# Altium PCB pcb.PcbDoc (part 1 of 2)
Units mil, origin at the board's own origin, x right, y up, seen from the top; angles counter-clockwise.
Board outline 3184 x 2328 mil, 2 copper layers (Top Layer, Bottom Layer); 79 components, 127 nets, 411 pads, 380 vias.
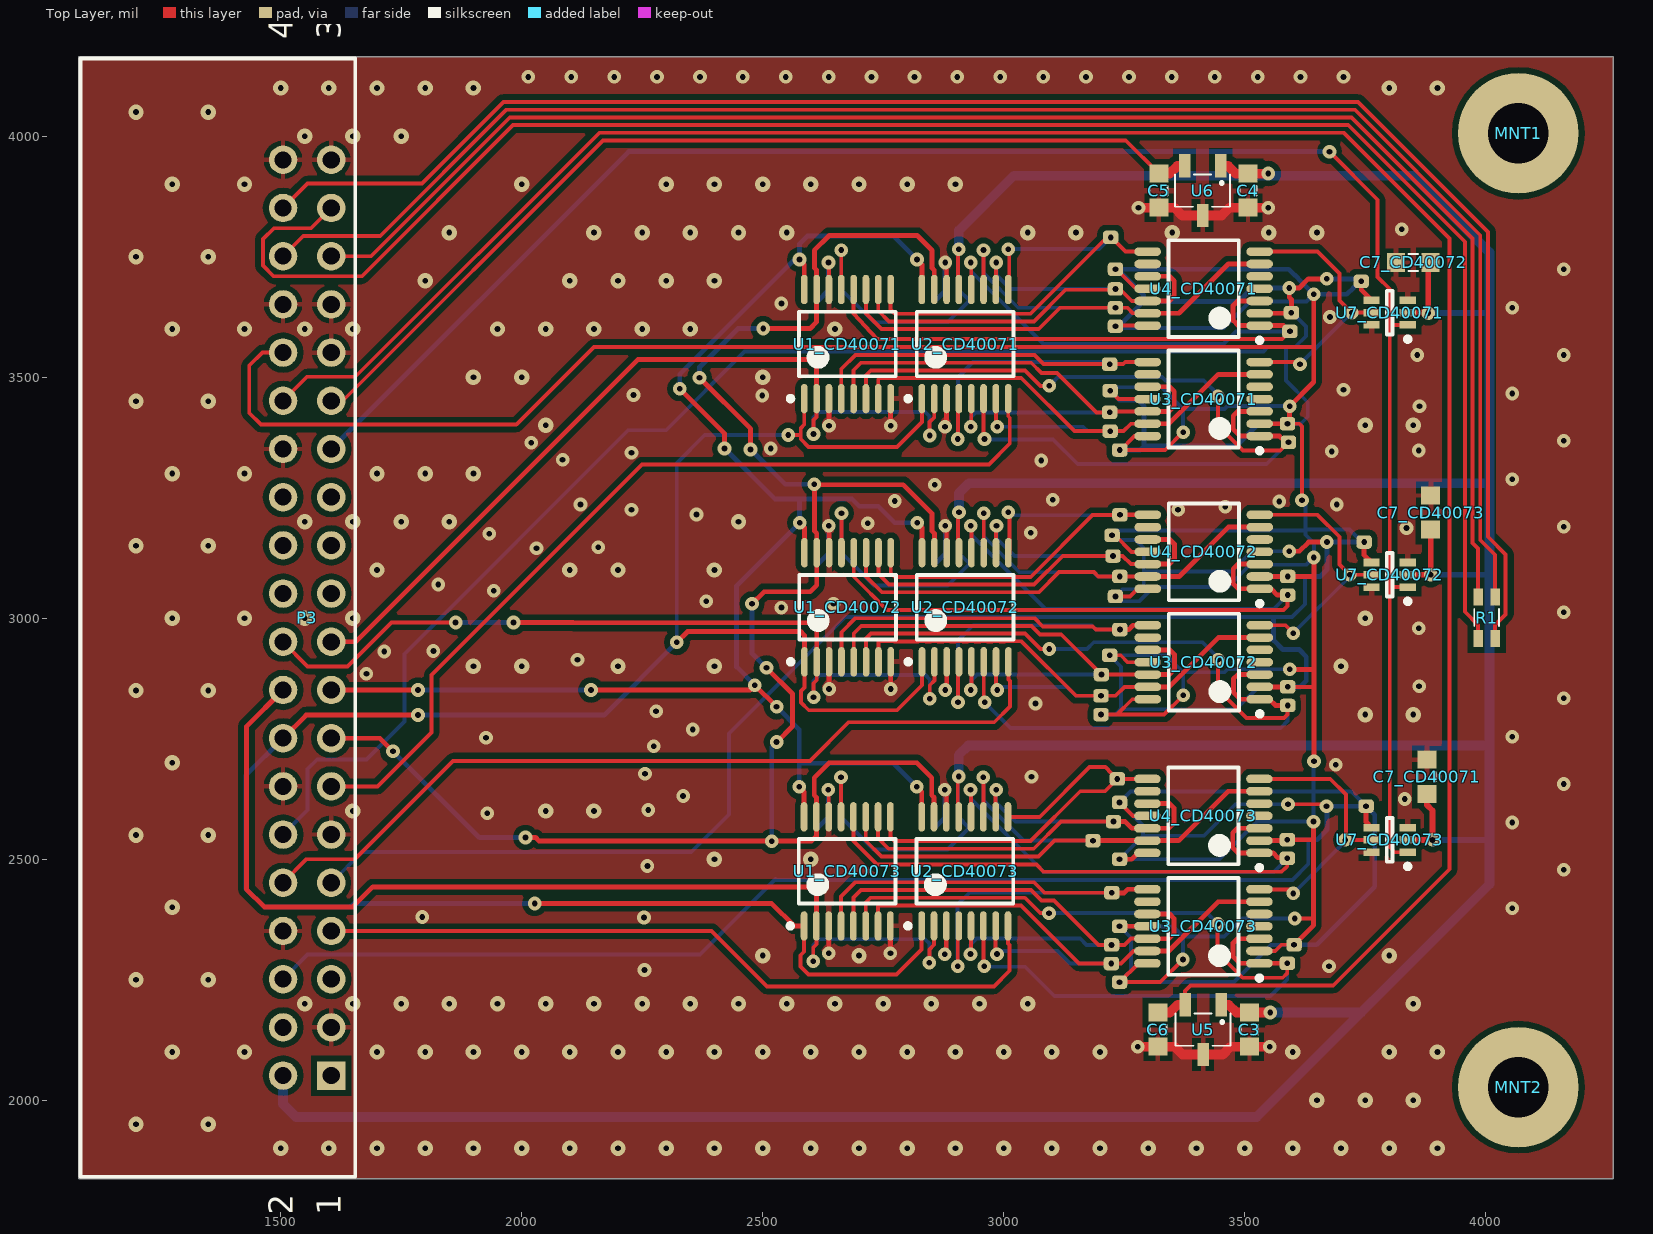
[diagram p0: Top Layer view]
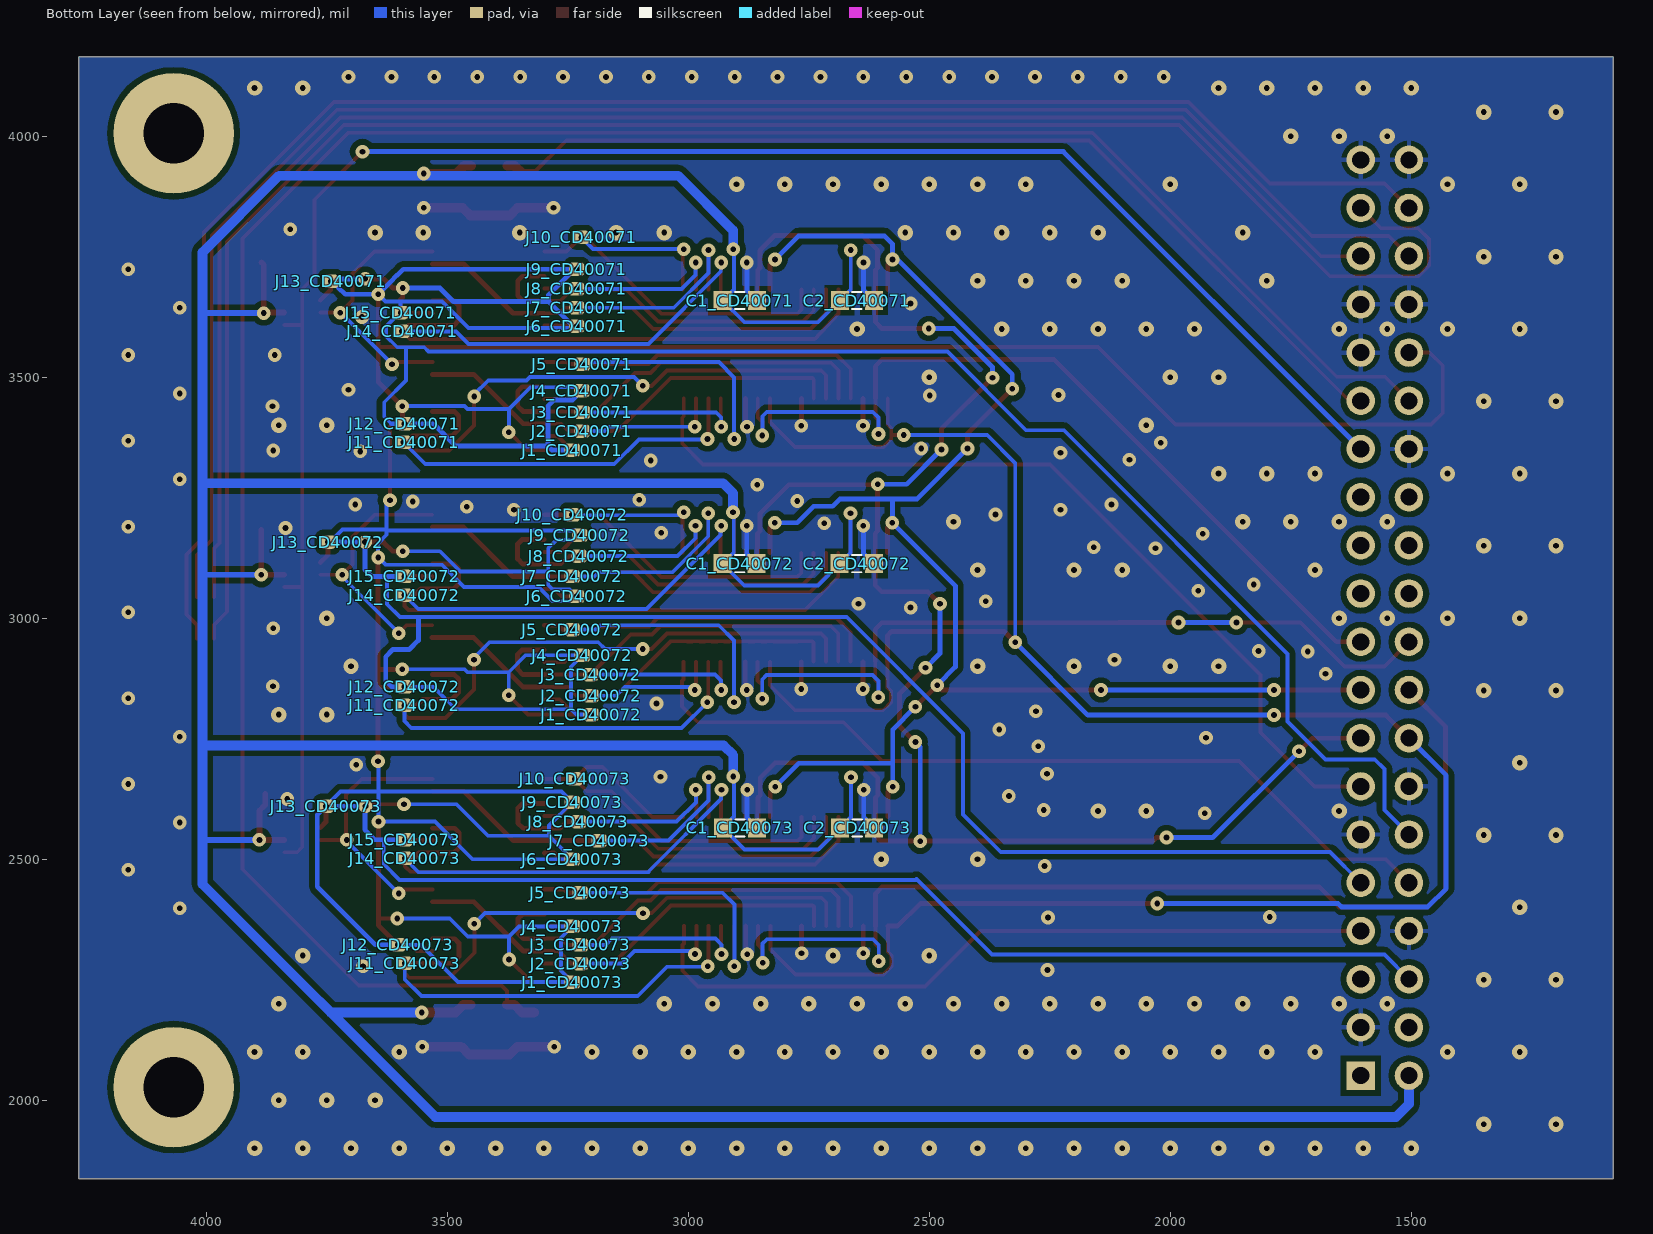
[diagram p1: Bottom Layer view, seen from below]
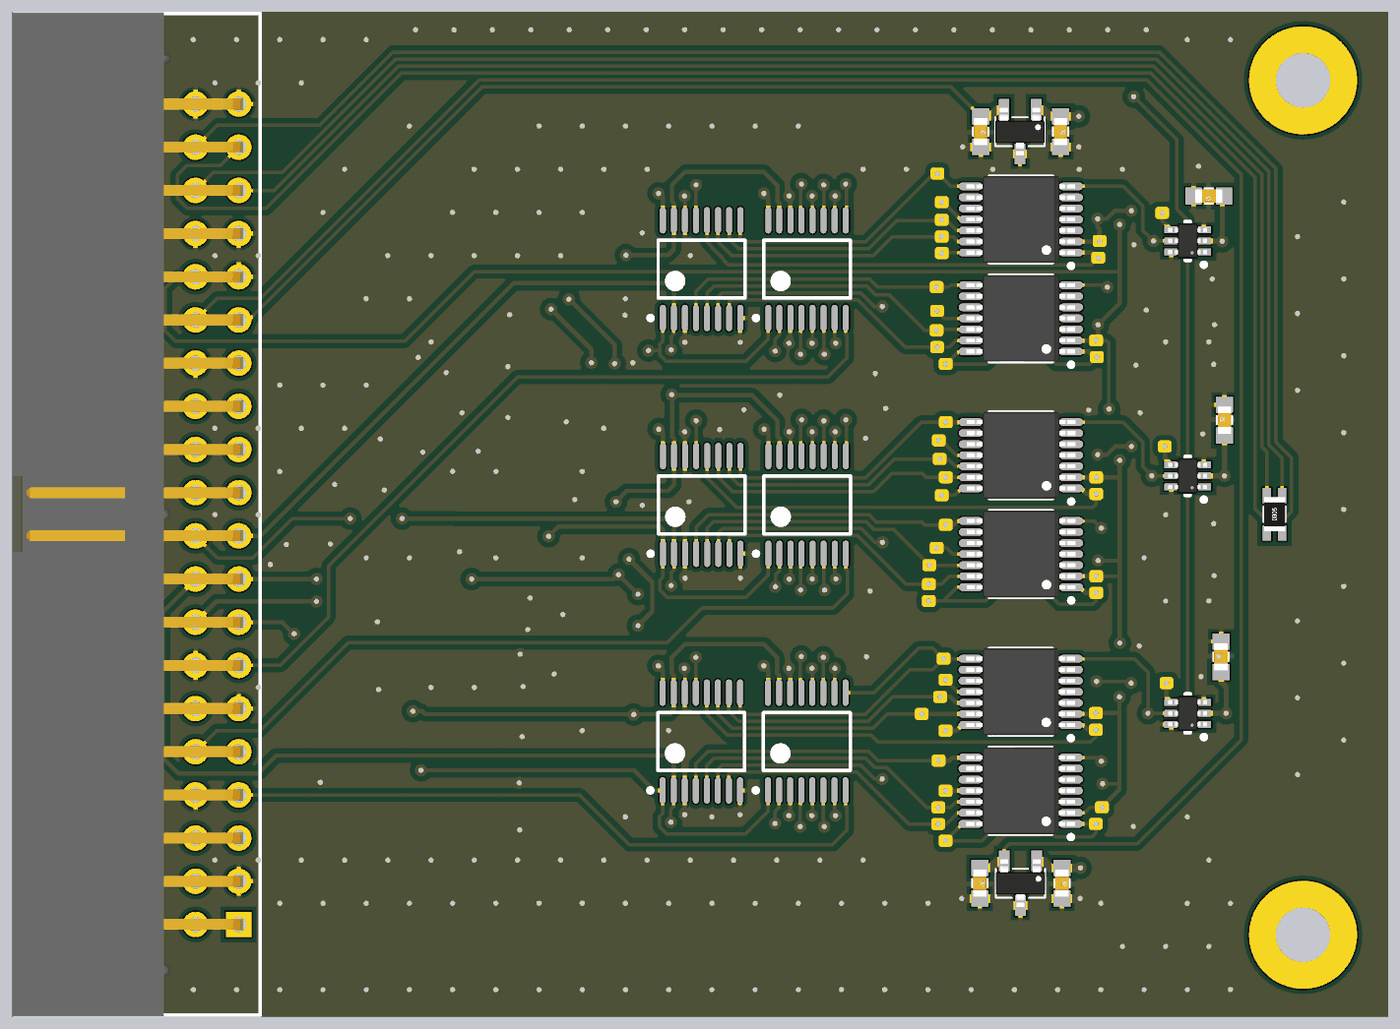
[diagram p3: 3D render of the assembled board from above, using the file's embedded part models]

## Layer stack, top to bottom
Top Solder: solder mask 0.4, Solder Resist, Dk 3.5
Top Layer: signal copper 1.4
Dielectric 1: dielectric 12.6, FR-4, Dk 4.8
Bottom Layer: signal copper 1.4
Bottom Solder: solder mask 0.4, Solder Resist, Dk 3.5

## Board outline
1081,1837 4265,1837 4265,4165 1081,4165

## Design rules (kind name [scope] priority, off if disabled: settings)
Clearance Clearance_Nets [InNet('NetJ1_CD40072_3') vs InNet('CURRENT RTN')] p1: gap=0
Clearance Clearance_Polygon [InPolygon] p2: gap=12
Clearance Clearance_TSSOP [HasFootprint('TSSOP14') vs HasFootprint('TSSOP14')] p3: gap=6
Clearance Clearance_3WaySplitter-RadFET [HasFootprint('3WaySplitter-RadFET') vs HasFootprint('3WaySplitter-RadFET')] p4: gap=0
Clearance [All] p5: gap=8
PolygonConnect PolygonConnect_Vias [IsVia] p1: connectstyle=Direct reliefconductorwidth=10 reliefentries=4 polygonreliefangle="90 Angle" airgapwidth=10
PolygonConnect [All] p2: connectstyle=Relief reliefconductorwidth=10 reliefentries=4 polygonreliefangle="90 Angle" airgapwidth=10
RoomDefinition top [InComponentClass('top')] p1: confinementstyle=ConfineIn formatcopy=TRUE lockcomponents=FALSE outline 0,0 2000,0 2000,1000 0,1000
RoomDefinition CD40073 [InComponentClass('CD40073')] p2: confinementstyle=ConfineIn formatcopy=TRUE lockcomponents=FALSE outline 2372.32,2214 3721.76,2214 3721.76,2760 2372.32,2760
RoomDefinition CD40072 [InComponentClass('CD40072')] p3: confinementstyle=ConfineIn formatcopy=TRUE lockcomponents=FALSE outline 2372.32,2760 3721.76,2760 3721.76,3306 2372.32,3306
RoomDefinition CD40071 [InComponentClass('CD40071')] p4: confinementstyle=ConfineIn formatcopy=TRUE lockcomponents=FALSE outline 2372,3306 3721.44,3306 3721.44,3852 2372,3852
RoutingVias [All] p1: holewidth=28 width=50 viastyle="Through Hole" minholewidth=28 minwidth=50 maxholewidth=28 maxwidth=50
ShortCircuit ShortCircuit_1 [InNet('NetJ1_CD40072_3') vs InNet('CURRENT_IN_CD40071')] p1: allowed=TRUE
ShortCircuit ShortCircuit_general [All] p2: allowed=TRUE
SolderMaskExpansion [All] p1: expansion=4
Width [All] p1: maxlimit=100 minlimit=8 preferedwidth=10
29 further rules are at their usual default settings.

## Classes and differential pairs
channel class CD4007_with_mux: CD40071 CD40072 CD40073
component class top: C3 C4 C5 C6 MNT1 MNT2 P3 R1 U5 U6
component class CD40073: C1_CD40073 C2_CD40073 C7_CD40073 J1_CD40073 J2_CD40073 J3_CD40073 J4_CD40073 J5_CD40073 J6_CD40073 J7_CD40073 J8_CD40073 J9_CD40073 J10_CD40073 J11_CD40073 J12_CD40073 J13_CD40073 J14_CD40073 J15_CD40073 U1_CD40073 U2_CD40073 U3_CD40073 U4_CD40073 U7_CD40073
component class CD40072: C1_CD40072 C2_CD40072 C7_CD40072 J1_CD40072 J2_CD40072 J3_CD40072 J4_CD40072 J5_CD40072 J6_CD40072 J7_CD40072 J8_CD40072 J9_CD40072 J10_CD40072 J11_CD40072 J12_CD40072 J13_CD40072 J14_CD40072 J15_CD40072 U1_CD40072 U2_CD40072 U3_CD40072 U4_CD40072 U7_CD40072
component class CD40071: C1_CD40071 C2_CD40071 C7_CD40071 J1_CD40071 J2_CD40071 J3_CD40071 J4_CD40071 J5_CD40071 J6_CD40071 J7_CD40071 J8_CD40071 J9_CD40071 J10_CD40071 J11_CD40071 J12_CD40071 J13_CD40071 J14_CD40071 J15_CD40071 U1_CD40071 U2_CD40071 U3_CD40071 U4_CD40071 U7_CD40071

## Components (designator, comment, footprint, x,y, rotation, side; value= is the part's Value field where it differs from the comment)
C1_CD40071 "100n/50V" SMD_Capacitor_0603 2893.44,3659 r180 bottom (schematic designator C1)
C1_CD40072 "100n/50V" SMD_Capacitor_0603 2893.76,3113 r180 bottom (schematic designator C1)
C1_CD40073 "100n/50V" SMD_Capacitor_0603 2893,2565 r180 bottom (schematic designator C1)
C2_CD40071 "100n/50V" SMD_Capacitor_0603 2650.44,3659 r180 bottom (schematic designator C2)
C2_CD40072 "100n/50V" SMD_Capacitor_0603 2650.76,3113 r180 bottom (schematic designator C2)
C2_CD40073 "100n/50V" SMD_Capacitor_0603 2650,2565 r180 bottom (schematic designator C2)
C3 "100n/50V" SMD_Capacitor_0603 3510,2146.44 r270 top
C4 "100n/50V" SMD_Capacitor_0603 3507,3887 r270 top
C5 "100n/50V" SMD_Capacitor_0603 3322,3887 r270 top
C6 "100n/50V" SMD_Capacitor_0603 3320,2146.44 r270 top
C7_CD40071 "100n/50V" SMD_Capacitor_0603 3878,2671 r90 top (schematic designator C7)
C7_CD40072 "100n/50V" SMD_Capacitor_0603 3850,3738 r180 top (schematic designator C7)
C7_CD40073 "100n/50V" SMD_Capacitor_0603 3886,3219 r90 top (schematic designator C7)
J1_CD40071 "3 way net tie junction T shape" "3WaySplitter-RadFET - Test" 3241,3348.91 r0 bottom net-tie (schematic designator J1)
J1_CD40072 "3 way net tie junction T shape" "3WaySplitter-RadFET - Test" 3202,2800 r0 bottom net-tie (schematic designator J1)
J1_CD40073 "3 way net tie junction T shape" "3WaySplitter-RadFET - Test" 3240.56,2244.91 r0 bottom net-tie (schematic designator J1)
J2_CD40071 "3 way net tie junction T shape" "3WaySplitter-RadFET - Test" 3221,3388 r0 bottom net-tie (schematic designator J2)
J2_CD40072 "3 way net tie junction T shape" "3WaySplitter-RadFET - Test" 3202,2839 r0 bottom net-tie (schematic designator J2)
J2_CD40073 "3 way net tie junction T shape" "3WaySplitter-RadFET - Test" 3223.56,2283.5 r0 bottom net-tie (schematic designator J2)
J3_CD40071 "3 way net tie junction T shape" "3WaySplitter-RadFET - Test" 3220,3427 r0 bottom net-tie (schematic designator J3)
J3_CD40072 "3 way net tie junction T shape" "3WaySplitter-RadFET - Test" 3203,2883 r0 bottom net-tie (schematic designator J3)
J3_CD40073 "3 way net tie junction T shape" "3WaySplitter-RadFET - Test" 3224,2322 r0 bottom net-tie (schematic designator J3)
J4_CD40071 "3 way net tie junction T shape" "3WaySplitter-RadFET - Test" 3221,3472 r0 bottom net-tie (schematic designator J4)
J4_CD40072 "3 way net tie junction T shape" "3WaySplitter-RadFET - Test" 3220,2923 r0 bottom net-tie (schematic designator J4)
J4_CD40073 "3 way net tie junction T shape" "3WaySplitter-RadFET - Test" 3240.56,2360.68 r0 bottom net-tie (schematic designator J4)
J5_CD40071 "3 way net tie junction T shape" "3WaySplitter-RadFET - Test" 3220,3527 r0 bottom net-tie (schematic designator J5)
J5_CD40072 "3 way net tie junction T shape" "3WaySplitter-RadFET - Test" 3241.32,2976.46 r0 bottom net-tie (schematic designator J5)
J5_CD40073 "3 way net tie junction T shape" "3WaySplitter-RadFET - Test" 3224.56,2430.46 r0 bottom net-tie (schematic designator J5)
J6_CD40071 "3 way net tie junction T shape" "3WaySplitter-RadFET - Test" 3232,3605.91 r0 bottom net-tie (schematic designator J6)
J6_CD40072 "3 way net tie junction T shape" "3WaySplitter-RadFET - Test" 3232,3045 r0 bottom net-tie (schematic designator J6)
J6_CD40073 "3 way net tie junction T shape" "3WaySplitter-RadFET - Test" 3240.56,2499.91 r0 bottom net-tie (schematic designator J6)
J7_CD40071 "3 way net tie junction T shape" "3WaySplitter-RadFET - Test" 3232,3644 r0 bottom net-tie (schematic designator J7)
J7_CD40072 "3 way net tie junction T shape" "3WaySplitter-RadFET - Test" 3241.13,3086.5 r0 bottom net-tie (schematic designator J7)
J7_CD40073 "3 way net tie junction T shape" "3WaySplitter-RadFET - Test" 3185.38,2538.5 r0 bottom net-tie (schematic designator J7)
J8_CD40071 "3 way net tie junction T shape" "3WaySplitter-RadFET - Test" 3232,3683 r0 bottom net-tie (schematic designator J8)
J8_CD40072 "3 way net tie junction T shape" "3WaySplitter-RadFET - Test" 3227,3129 r0 bottom net-tie (schematic designator J8)
J8_CD40073 "3 way net tie junction T shape" "3WaySplitter-RadFET - Test" 3228,2578 r0 bottom net-tie (schematic designator J8)
J9_CD40071 "3 way net tie junction T shape" "3WaySplitter-RadFET - Test" 3232,3724 r0 bottom net-tie (schematic designator J9)
J9_CD40072 "3 way net tie junction T shape" "3WaySplitter-RadFET - Test" 3225,3172 r0 bottom net-tie (schematic designator J9)
J9_CD40073 "3 way net tie junction T shape" "3WaySplitter-RadFET - Test" 3240.56,2617.68 r0 bottom net-tie (schematic designator J9)
J10_CD40071 "3 way net tie junction T shape" "3WaySplitter-RadFET - Test" 3222,3790 r0 bottom net-tie (schematic designator J10)
J10_CD40072 "3 way net tie junction T shape" "3WaySplitter-RadFET - Test" 3241.32,3214.46 r0 bottom net-tie (schematic designator J10)
J10_CD40073 "3 way net tie junction T shape" "3WaySplitter-RadFET - Test" 3236,2666.46 r0 bottom net-tie (schematic designator J10)
J11_CD40071 "3 way net tie junction T shape" "3WaySplitter-RadFET - Test" 3591,3365 r180 bottom net-tie (schematic designator J11)
J11_CD40072 "3 way net tie junction T shape" "3WaySplitter-RadFET - Test" 3589.31,2818.91 r180 bottom net-tie (schematic designator J11)
J11_CD40073 "3 way net tie junction T shape" "3WaySplitter-RadFET - Test" 3588.56,2283.91 r180 bottom net-tie (schematic designator J11)
J12_CD40071 "3 way net tie junction T shape" "3WaySplitter-RadFET - Test" 3589,3403.5 r180 bottom net-tie (schematic designator J12)
J12_CD40072 "3 way net tie junction T shape" "3WaySplitter-RadFET - Test" 3589.31,2857.5 r180 bottom net-tie (schematic designator J12)
J12_CD40073 "3 way net tie junction T shape" "3WaySplitter-RadFET - Test" 3602.56,2322.5 r180 bottom net-tie (schematic designator J12)
J13_CD40071 "3 way net tie junction T shape" "3WaySplitter-RadFET - Test" 3742,3699 r180 bottom net-tie (schematic designator J13)
J13_CD40072 "3 way net tie junction T shape" "3WaySplitter-RadFET - Test" 3748,3158 r180 bottom net-tie (schematic designator J13)
J13_CD40073 "3 way net tie junction T shape" "3WaySplitter-RadFET - Test" 3752,2610 r180 bottom net-tie (schematic designator J13)
J14_CD40071 "3 way net tie junction T shape" "3WaySplitter-RadFET - Test" 3594,3595 r180 bottom net-tie (schematic designator J14)
J14_CD40072 "3 way net tie junction T shape" "3WaySplitter-RadFET - Test" 3589.31,3047.91 r180 bottom net-tie (schematic designator J14)
J14_CD40073 "3 way net tie junction T shape" "3WaySplitter-RadFET - Test" 3588.56,2501.91 r180 bottom net-tie (schematic designator J14)
J15_CD40071 "3 way net tie junction T shape" "3WaySplitter-RadFET - Test" 3597,3634 r180 bottom net-tie (schematic designator J15)
J15_CD40072 "3 way net tie junction T shape" "3WaySplitter-RadFET - Test" 3589.31,3086.5 r180 bottom net-tie (schematic designator J15)
J15_CD40073 "3 way net tie junction T shape" "3WaySplitter-RadFET - Test" 3588.56,2540.5 r180 bottom net-tie (schematic designator J15)
MNT1 "Mounting Hole" PC-104_PcbMntHole_M3 4068,4006 r180 top
MNT2 "Mounting Hole" PC-104_PcbMntHole_M3 4068,2027 r0 top
P3 "IDC-40-RadFET" IDC-40-Male-Socket-Angle 1605,2051.03 r90 top
R1 "PT1000" SMD_Resistor-shunt_0805 4002,3001 r90 top
U1_CD40071 "ADG708BRU" ADI-RU-16_N 2676,3568.68 r90 top (schematic designator U1)
U1_CD40072 "ADG708BRU" ADI-RU-16_N 2676.32,3022.68 r90 top (schematic designator U1)
U1_CD40073 "ADG708BRU" ADI-RU-16_N 2675.56,2474.68 r90 top (schematic designator U1)
U2_CD40071 "ADG708BRU" ADI-RU-16_N 2920,3568.68 r90 top (schematic designator U2)
U2_CD40072 "ADG708BRU" ADI-RU-16_N 2920.32,3022.68 r90 top (schematic designator U2)
U2_CD40073 "ADG708BRU" ADI-RU-16_N 2919.56,2474.68 r90 top (schematic designator U2)
U3_CD40071 "CD4007" TSSOP14 3415,3454.68 r180 top (schematic designator U3)
U3_CD40072 "CD4007" TSSOP14 3415.32,2908.68 r180 top (schematic designator U3)
U3_CD40073 "CD4007" TSSOP14 3414.56,2360.68 r180 top (schematic designator U3)
U4_CD40071 "CD4007" TSSOP14 3415,3683.68 r180 top (schematic designator U4)
U4_CD40072 "CD4007" TSSOP14 3415.32,3137.68 r180 top (schematic designator U4)
U4_CD40073 "CD4007" TSSOP14 3414.56,2589.68 r180 top (schematic designator U4)
U5 "LM60" SOT23-3 3414,2146.44 r270 top
U6 "LM60" SOT23-3 3413,3887 r270 top
U7_CD40071 "ADG849YKSZ" SC70-LT6_N 3801,3634 r180 top (schematic designator U7)
U7_CD40072 "ADG849YKSZ" SC70-LT6_N 3801,3090 r180 top (schematic designator U7)
U7_CD40073 "ADG849YKSZ" SC70-LT6_N 3801,2540 r180 top (schematic designator U7)

## Footprints (in the part's own frame and the unit in brackets; to place one, negate y for a bottom-side part, rotate by r counter-clockwise, add the part's x,y. Pads: shape width x height; smd on the part's side, far side on the other; paste and mask are expansions set on the pad)
"3WaySplitter-RadFET - Test" [mil] "3WaySplitter"
  rrect50% 32x28 all layers, no hole paste+0 mask+0: 1(0,0) 3(0,0)
  rrect50% 32x28 hole 11.81 paste+0 mask+0: 2(0,0)
ADI-RU-16_N [mm] "SOP, 16-Leads, Body 5x4.4mm, Pitch 0.65mm, IPC Medium Density"
  oval 1.55x0.35 smd: 1(-2.875,2.275) 2(-2.875,1.625) 3(-2.875,0.975) 4(-2.875,0.325) 5(-2.875,-0.325) 6(-2.875,-0.975) 7(-2.875,-1.625) 8(-2.875,-2.275) 9(2.875,-2.275) 10(2.875,-1.625) 11(2.875,-0.975) 12(2.875,-0.325) 13(2.875,0.325) 14(2.875,0.975) 15(2.875,1.625) 16(2.875,2.275)
  silkscreen extent -3,-2.55 1.7,3.12, body extent -2.25,-2.55 2.25,2.55, height 1.2
IDC-40-Male-Socket-Angle [mm] "Connector; IDC 40, Male Socket Angle"
  rect 1.5x1.5 hole 0.9: 1(0,0)
  round 1.5 hole 0.9: 2(0,2.54) 3(2.54,0) 4(2.54,2.54) 5(5.08,0) 6(5.08,2.54) 7(7.62,0) 8(7.62,2.54) 9(10.16,0) 10(10.16,2.54) 11(12.7,0) 12(12.7,2.54) 13(15.24,0) 14(15.24,2.54) 15(17.78,0) 16(17.78,2.54) 17(20.32,0) 18(20.32,2.54) 19(22.86,0) 20(22.86,2.54) 21(25.4,0) 22(25.4,2.54) 23(27.94,0) 24(27.94,2.54) 25(30.48,0) 26(30.48,2.54) 27(33.02,0) 28(33.02,2.54) 29(35.56,0) 30(35.56,2.54) 31(38.1,0) 32(38.1,2.54) 33(40.64,0) 34(40.64,2.54) 35(43.18,0) 36(43.18,2.54) 37(45.72,0) 38(45.72,2.54) 39(48.26,0) 40(48.26,2.54)
  silkscreen extent -5.33,-1.27 53.59,13.21, body extent -5.39,-0.25 53.65,13.31, height 9.08
PC-104_PcbMntHole_M3 [mm] "PCB Mounting Hole for PC-104 standard. Based on Pumpkin's Kit."
  round 6.35 hole 3.2: 1(0,0)
SC70-LT6_N [mm] "SOT353, 6-Leads, Body 2x1.3mm, Pitch 0.65mm, Lead Span 2.1mm, IPC Medium Density"
  rect 0.85x0.4 smd: 1(-0.95,0.65) 2(-0.95,0) 3(-0.95,-0.65) 4(0.95,-0.65) 5(0.95,0) 6(0.95,0.65)
  silkscreen extent -1.07,-1.15 0.15,1.52, body extent -1.15,-1.05 1.15,1.05, height 1
SMD_Capacitor_0603 [mm] "SMD Capacitor, Inch 0603, Metric 1608."
  rect 0.95x1 smd: 1(-0.9,0) 2(0.9,0)
  silkscreen extent -0.25,-0.45 0.25,0.45, body extent -0.8,-0.4 0.8,0.4, height 0.3
SMD_Resistor-shunt_0805 [mm] "SMD Shunt Resistor, Inch 0805, Metric 2012."
  rect 0.9x0.5 smd: 1(-1.1,0.45) 2(-1.1,-0.45) 3(1.1,-0.45) 4(1.1,0.45)
  silkscreen extent -0.45,-0.65 0.45,0.65, body extent -1,-0.62 1,0.63, height 0.5
SOT23-3 [mm] "JEDEC TO-236AB package."
  rect 1.22x0.62 smd: 1(-1.31,0.95) 2(-1.31,-0.95) 3(1.31,0)
  silkscreen extent -0.85,-1.45 0.85,1.45, body extent -1.4,-1.45 1.4,1.45, height 1.3
TSSOP14 [mm] "TSSOP, 14-Leads, Body 5.00x4.40mm, Pitch 0.65mm, IPC Medium Density"
  oval 1.4x0.45 smd: 1(-2.95,1.95) 2(-2.95,1.3) 3(-2.95,0.65) 4(-2.95,0) 5(-2.95,-0.65) 6(-2.95,-1.3) 7(-2.95,-1.95) 8(2.95,-1.95) 9(2.95,-1.3) 10(2.95,-0.65) 11(2.95,0) 12(2.95,0.65) 13(2.95,1.3) 14(2.95,1.95)
  silkscreen extent -3.08,-2.55 1.85,2.85, body extent -3.2,-2.55 3.2,2.55, height 1.2

## Part data
C1_CD40071 C1_CD40072 C1_CD40073 C2_CD40071 C2_CD40072 C2_CD40073 C3 C4 C5 C6 C7_CD40071 C7_CD40072 C7_CD40073: library part Cer_C0603T104K5RALTU, "Ceramic Cap Kemet COTS 100n/50V X7R 0603"
J1_CD40071 J1_CD40072 J1_CD40073 J2_CD40071 J2_CD40072 J2_CD40073 J3_CD40071 J3_CD40072 J3_CD40073 J4_CD40071 J4_CD40072 J4_CD40073 J5_CD40071 J5_CD40072 J5_CD40073 J6_CD40071 J6_CD40072 J6_CD40073 J7_CD40071 J7_CD40072 J7_CD40073 J8_CD40071 J8_CD40072 J8_CD40073 J9_CD40071 J9_CD40072 J9_CD40073 J10_CD40071 J10_CD40072 J10_CD40073 J11_CD40071 J11_CD40072 J11_CD40073 J12_CD40071 J12_CD40072 J12_CD40073 J13_CD40071 J13_CD40072 J13_CD40073 J14_CD40071 J14_CD40072 J14_CD40073 J15_CD40071 J15_CD40072 J15_CD40073: library part 3wayT-RadFET
MNT1 MNT2: library part MntHole, "PCB Mounting Hole"
R1: "Platinum Thin-Film Chip Sensor"
U1_CD40071 U1_CD40072 U1_CD40073 U2_CD40071 U2_CD40072 U2_CD40073: "1.8 to 5.5 V / +/-2.5 V, CMOS Low Voltage 3 Ohm, 8-Channel Multiplexer, -40 to 125 degC, 16-pin SOP (RU-16), Tube"
U3_CD40071 U3_CD40072 U3_CD40073 U4_CD40071 U4_CD40072 U4_CD40073: "CMOS Dual Complementary Pair Plus Inverter"
U5 U6: "Analog temperature sensor"
U7_CD40071 U7_CD40072 U7_CD40073: "CMOS Analog switch"

## Via types
v1: diameter 28.35, hole 11.81, Top Layer to Bottom Layer, tented both sides, 210 vias
v2: diameter 32, hole 11.81, Top Layer to Bottom Layer, tented both sides, 170 vias

## Nets (pads, with @x,y where several pads share a name; then routed paths per layer and width w, separated by ;. In a path a pad name is that pad's centre, name@x,y a point inside that pad or via, vN(x,y) a via of type N, cw(c..) or ccw(c..) an arc to the next point about the centre after c; other vN are vias at no path point)
3.3V-DIGITAL: P3.4
4.5V-ANALOG: P3.1
5V-ANALOG: C1_CD40071.1 C1_CD40072.1 C1_CD40073.1 C2_CD40071.1 C2_CD40072.1 C2_CD40073.1 C3.1 C4.1 C7_CD40071.1 C7_CD40072.1 C7_CD40073.1 P3.2 U1_CD40071.13 U1_CD40072.13 U1_CD40073.13 U2_CD40071.13 U2_CD40072.13 U2_CD40073.13 U5.1 U6.1 U7_CD40071.2 U7_CD40072.2 U7_CD40073.2 | length 10873.1
  Top Layer w8: U1_CD40073.13@2662.76,2587.87 v1(2662.76,2669.68) ; U1_CD40071.13@2663.2,3681.87 v1(2663.2,3763.68) ; U1_CD40072.13@2663.52,3135.87 v1(2663.52,3217.68) ; U2_CD40073.13@2904.76,2587.87 v1@2904.76,2669.68 ; U2_CD40071.13@2905.2,3681.87 v1@2905.2,3763.68 ; U2_CD40072.13@2905.52,3135.87 v1@2905.52,3217.68
  Top Layer w12: U7_CD40073.2@3838.4,2540 v1(3890,2540) 3890,2601 3878,2613 C7_CD40071.1@3878,2635.57 ; U7_CD40072.2@3838.4,3090 v1(3886,3090) C7_CD40073.1@3886,3183.57 ; U7_CD40071.2@3838.4,3634 v1@3880,3634 ; v1(3881,3633) 3881,3733.57 C7_CD40072.1@3885.43,3738
  Top Layer w20: U6.1@3450.4,3938.57 3465.43,3938.57 3481.57,3922.43 C4.1@3507,3922.43 v1(3549,3922.43) ; U5.1@3451.4,2198.02 3466.98,2198.02 3483.13,2181.87 C3.1@3510,2181.87 v1(3553,2181.87)
  Bottom Layer w8: v1(2662.76,2669.68) 2662.76,2587.67 C2_CD40073.1@2685.43,2565 2730.43,2520 2883.43,2520 C1_CD40073.1@2928.43,2565 2905.18,2588.25 2905.18,2670.1 v1(2906.76,2671.68) ; v1(2663.2,3763.68) 2663.2,3681.67 C2_CD40071.1@2685.87,3659 2730.87,3614 2883.87,3614 C1_CD40071.1@2928.87,3659 2905.62,3682.25 2905.62,3764.1 v1(2907.2,3765.68) ; v1(2663.52,3217.68) 2663.52,3135.67 C2_CD40072.1@2686.19,3113 2731.19,3068 2884.19,3068 C1_CD40072.1@2929.19,3113 2905.94,3136.25 2905.94,3218.1 v1(2907.52,3219.68)
  Bottom Layer w12: v1(3881,3633) 4008,3633 ; v1(3886,3090) 4008,3090 ; v1(3890,2540) 4008,2540
  Bottom Layer w20: P3.2@1505,2051.03 1505,1992 1532,1965 3525,1965 4008,2448 4008,2540 4008,3759 3849,3918 3021,3918 2907.2,3804.2 v1(2907.2,3765.68) ; v1(2906.76,2671.68) 2906.76,2715.76 2927,2736 4008,2736 ; v1(2907.52,3219.68) 2907.52,3259.52 2928,3280 4006,3280 ; v1(3553,2181.87) 3741.87,2181.87
ADC_CD40071_P: J1_CD40071.1 J4_CD40071.1 J6_CD40071.1 J9_CD40071.1 J12_CD40071.1 J13_CD40071.1 J15_CD40071.1 P3.12 | length 4163.6
  Top Layer w10: 3597,3649 3597,3661 3592.44,3665.56 v1(3592.44,3685) 3613.44,3685 3632.44,3704 v1(3670.44,3704)
  Bottom Layer w8: P3.12@1505,2551.03 1556,2602.03 1556,2687 1576,2707 1678,2707 1757,2786 1757,2926 2221,3390 2299.44,3390 2462.44,3553 3539,3553 3548,3562 3586,3562 ; J15_CD40071.1@3598,3634 3627,3605 3627,3585 3604,3562 3586,3562 ; 3616.5,3403.5 3631,3418 3631,3448 3586,3493 3586,3562
  Bottom Layer w10: J4_CD40071.1@3221,3472 3240,3453 3278,3453 3291.44,3439.56 3291.44,3357 ; J9_CD40071.1@3234.41,3726.41 3290.44,3670.37 3290.44,3657 3487.4,3657 3515.4,3685 v1(3592.44,3685) ; J6_CD40071.1@3240,3607 3290.44,3657.44 ; J1_CD40071.1@3241,3349 3283.44,3349 3291.44,3357 ; 3616.5,3403.5 J12_CD40071.1@3589,3403.5 3528.78,3403.5 3482.27,3357 3291.44,3357 ; v1(3670.44,3704) J13_CD40071.1@3742,3704
ADC_CD40072_P: J1_CD40072.1 J4_CD40072.1 J6_CD40072.1 J9_CD40072.1 J12_CD40072.1 J13_CD40072.1 J15_CD40072.1 P3.9 | length 4005
  Top Layer w10: v1(3592.76,3139) 3613.76,3139 3632.76,3158 v1(3670.76,3158)
  Bottom Layer w8: P3.9@1605,2451.03 1668.97,2515 2352,2515 2430,2593 2430,2761 2671.46,3002.46 3598.46,3002.46 3625,3029 3625,3085 ; J1_CD40072.1@3201,2800 J1_CD40072.1@3202,2800 3232.38,2800 3243.69,2811.31 3243.69,2899.31 J4_CD40072.1@3220,2923 ; J6_CD40072.1@3232,3045 3247,3060 3281.76,3060 3290.76,3069 3290.76,3096.68 ; J9_CD40072.1@3235,3162 3274,3162 3290.76,3145.24 3290.76,3096.68 ; 3244,2811 3482.59,2811 3529.09,2857.5 J12_CD40072.1@3589.31,2857.5 ; v1(3592.76,3139) 3515.71,3139 3473.4,3096.68 3290.76,3096.68
  Bottom Layer w10: 3243.69,2811.31 3244,2811 ; 3560,3000 3560,2954 3579,2935 3613,2935 3628,2920 3628,2870 3615.5,2857.5 J12_CD40072.1@3589.31,2857.5 ; J15_CD40072.1@3589.31,3086.5 3657,3086.5 3670.93,3100.43 3670.93,3157.83 v1(3670.76,3158) J13_CD40072.1@3748,3158
ADC_CD40073_P: J1_CD40073.1 J4_CD40073.1 J6_CD40073.1 J9_CD40073.1 J12_CD40073.1 J13_CD40073.1 J15_CD40073.1 P3.6 | length 3976.7
  Top Layer w8: v1(3590,2614) 3666,2614 v1(3670,2610)
  Bottom Layer w8: P3.6@1505,2251.03 1555.97,2302 2370,2302 2527,2459 ; 2527,2457 3599,2457 3632,2490 3632,2541 ; J4_CD40073.1@3240.56,2360.68 3264.24,2337 3264.24,2268.6 J1_CD40073.1@3240.56,2244.91 3477.91,2244.91 3555,2322 J12_CD40073.1@3602.56,2322 ; J6_CD40073.1@3240.56,2499.91 3289.33,2548.68 ; J9_CD40073.1@3240.94,2618.06 3289.33,2569.67 3289.33,2548.68 ; v1(3590,2614) 3481,2614 3415.68,2548.68 3289.33,2548.68
  Bottom Layer w10: J15_CD40073.1@3588.56,2540.5 3650.5,2540.5 3671,2561 v1@3671,2608 ; J12_CD40073.1@3612.56,2322.5 3649.5,2322.5 3770,2443 3770,2592 J13_CD40073.1@3752,2610 v1(3670,2610)
ADC_CH0_N: P3.7 U2_CD40073.8 | length 1562.8
  Top Layer w8: P3.7@1605,2351.03 2393.97,2351.03 2509,2236 2979.87,2236 3012.32,2268.44 3012.32,2321.93 3009.13,2325.12 U2_CD40073.8@3009.13,2361.5
ADC_CH1_N: P3.10 U2_CD40072.8 | length 1753.8
  Top Layer w8: P3.10@1505,2451.03 1553.97,2500 1654,2500 1858,2704 2598,2704 2678,2784 2980.63,2784 3013.07,2816.44 3013.07,2869.93 3009.88,2873.12 U2_CD40072.8@3009.88,2909.5
ADC_CH2_N: P3.13 U2_CD40071.8 | length 1866.5
  Top Layer w8: P3.13@1605,2651.03 1701.03,2651.03 1813,2763 1813,2882 2250,3319 2969.32,3319 3012.76,3362.44 3012.76,3415.93 3009.57,3419.12 U2_CD40071.8@3009.57,3455.5
AIN0: C5.1 P3.29 U6.2 | length 2029.3
  Top Layer w8: P3.29@1605,3451.03 1629.03,3451.03 2169,3991 3253.43,3991 C5.1@3322,3922.43
  Top Layer w20: C5.1@3322,3922.43 3344.43,3922.43 3360.57,3938.57 U6.2@3375.6,3938.57
AIN1: C6.1 P3.30 U5.2 | length 4794.8
  Top Layer w8: P3.30@1505,3451.03 1554.97,3501 1654.97,3501 2160.97,4007 3706,4007 3925,3788 3925,2479 3684,2238 3388,2238 3376.6,2226.6 U5.2@3376.6,2198.02
  Top Layer w20: C6.1@3320,2181.87 3344.87,2181.87 3361.02,2198.02 U5.2@3376.6,2198.02
C_DIODE_0-2_CD40071: J5_CD40071.2 U1_CD40071.4 | length 638.1
  Top Layer w8: U1_CD40071.4@2663.2,3455.5 2663.2,3516.89 2692.32,3546.01 2793.27,3546.01 ; 2793.28,3546 2802.72,3546 ; 2802.73,3546.01 3063.89,3546.01 3082.9,3527 J5_CD40071.2@3220,3527
C_DIODE_0-2_CD40072: J5_CD40072.2 U1_CD40072.4 | length 661
  Top Layer w8: U1_CD40072.4@2663.52,2909.5 2663.52,2970.89 2692.64,3000.01 2793.59,3000.01 2803.03,3000 3064.2,3000.01 3081.21,2983 3185,2983 3191.54,2976.46 J5_CD40072.2@3241.32,2976.46
C_DIODE_0-2_CD40073: J5_CD40073.2 U1_CD40073.4 | length 644.2
  Top Layer w8: U1_CD40073.4@2662.76,2361.5 2662.76,2422.89 2691.88,2452.01 2792.83,2452.01 2802.28,2452 3063.45,2452.01 3085,2430.46 J5_CD40073.2@3224.56,2430.46
C_DIODE_3-5_CD40071: J10_CD40071.2 U1_CD40071.9 | length 565
  Top Layer w8: U1_CD40071.9@2765.57,3681.87 2765.57,3640.12 2774,3631.68 3056,3631.68 J10_CD40071.2@3218.16,3793.84
C_DIODE_3-5_CD40072: J10_CD40072.2 U1_CD40072.9 | length 556.5
  Top Layer w8: U1_CD40072.9@2765.88,3135.87 2765.88,3094.12 2774.32,3085.68 3056.32,3085.68 3184.63,3214 3224,3214
C_DIODE_3-5_CD40073: J10_CD40073.2 U1_CD40073.9 | length 569.5
  Top Layer w8: U1_CD40073.9@2765.13,2587.87 2765.13,2546.12 2773.56,2537.68 3055.56,2537.68 3158.87,2641 3210.54,2641 J10_CD40073.2@3236,2666.46
C_MOS_0_CD40071: J2_CD40071.2 U1_CD40071.7 | length 567.7
  Top Layer w8: U1_CD40071.7@2739.98,3455.5 2739.98,3495.54 2742.45,3498.01 2773.39,3498.01 2822.6,3498 2838.26,3498.01 2848.19,3498 2863.85,3498.01 2873.78,3498 2889.44,3498.01 2899.37,3498 ; 2899.38,3498.01 2915.03,3498.01 2924.96,3498 2940.62,3498.01 ; 2940.63,3498 2950.55,3498 2966.21,3498.01 2976.14,3498 2991.8,3498.01 3001.74,3498 3036.68,3498.01 3146.68,3388 J2_CD40071.2@3221,3388
C_MOS_0_CD40072: J2_CD40072.2 U1_CD40072.7 | length 549.6
  Top Layer w8: U1_CD40072.7@2740.29,2909.5 2740.29,2949.54 2742.76,2952.01 2773.71,2952.01 2822.92,2952 2838.57,2952.01 ; 2838.58,2952 2848.51,2952 2864.16,2952.01 2874.1,2952 2889.75,2952.01 2899.69,2952 2915.34,2952.01 2925.28,2952 2940.93,2952.01 2950.87,2952 ; 2950.88,2952.01 2966.53,2952.01 2976.46,2952 2992.12,2952.01 3002.05,2952 3036.99,2952.01 3150,2839 J2_CD40072.2@3202,2839
C_MOS_0_CD40073: J2_CD40073.2 U1_CD40073.7 | length 575.1
  Top Layer w8: U1_CD40073.7@2739.54,2361.5 2739.54,2401.54 2742.01,2404.01 2772.95,2404.01 2822.16,2404 2837.82,2404.01 2847.75,2404 2863.41,2404.01 2873.34,2404 2889,2404.01 2898.93,2404 2914.59,2404.01 2924.52,2404 ; 2924.53,2404.01 2940.18,2404.01 2950.11,2404 2965.77,2404.01 ; 2965.78,2404 2975.7,2404 2991.36,2404.01 3001.29,2404 3036.24,2404.01 3156.74,2283.5 J2_CD40073.2@3223.56,2283.5
C_MOS_1_CD40071: J11_CD40071.2 U1_CD40071.6 | length 1058
  Top Layer w8: U1_CD40071.6@2714.39,3455.5 2714.39,3503.94 2724.45,3514.01 2780.02,3514.01 ; 2780.03,3514 2815.97,3514 ; 2815.98,3514.01 3044.43,3514.01 3076.44,3482 v1(3094.44,3482) ; v1(3444.44,3460) 3444.44,3400 3496.44,3348 3574,3348 J11_CD40071.2@3591,3365
  Bottom Layer w8: v1(3094.44,3482) 3113.1,3500.66 3328.58,3500.66 3335.9,3493.34 3415.1,3493.34 3444.44,3464 v1(3444.44,3460)
C_MOS_1_CD40072: J11_CD40072.2 U1_CD40072.6 | length 1075.5
  Top Layer w8: U1_CD40072.6@2714.7,2909.5 2714.7,2957.94 2724.76,2968.01 2780.33,2968.01 2816.29,2968 3044.75,2968.01 3076.76,2936 v1(3094.76,2936) ; v1(3444.76,2914) 3444.76,2852.24 3504.09,2792.91 3581.91,2792.91 3589.31,2800.31 J11_CD40072.2@3589.31,2818.91
  Bottom Layer w8: v1@3090.76,2936 3173,2936 3187,2950 3412.76,2950 3444.76,2918 v1(3444.76,2914)
C_MOS_1_CD40073: J11_CD40073.2 U1_CD40073.6 | length 1058.7
  Top Layer w8: U1_CD40073.6@2713.94,2361.5 2713.94,2409.94 2724.01,2420.01 2779.58,2420.01 2815.53,2420 3043.99,2420.01 3076,2388 v1(3094,2388) ; v1(3444,2366) 3444,2306 3496,2254 3579,2254 3588,2263 ; 3588.56,2263.56 J11_CD40073.2@3588.56,2283.91
  Bottom Layer w8: v1(3094,2388) 3422,2388 v1(3444,2366) v1@3444,2370
C_MOS_2_CD40071: J3_CD40071.2 U1_CD40071.5 | length 639.3
  Top Layer w8: U1_CD40071.5@2688.8,3455.5 2688.8,3514.48 2704.32,3530.01 2786.65,3530.01 2809.35,3530 3057.26,3530.01 3078.27,3509 3111,3509 3193,3427 J3_CD40071.2@3220,3427
C_MOS_2_CD40072: J3_CD40072.2 U1_CD40072.5 | length 607.8
  Top Layer w8: U1_CD40072.5@2689.11,2909.5 2689.11,2968.48 2704.64,2984.01 2786.96,2984.01 2809.66,2984 3057.58,2984.01 3075.59,2966 3101.77,2966 3119.56,2966 J3_CD40072.2@3193.4,2892.16
C_MOS_2_CD40073: J3_CD40073.2 U1_CD40073.5 | length 648.3
  Top Layer w8: U1_CD40073.5@2688.35,2361.5 2688.35,2420.48 2703.88,2436.01 2786.2,2436.01 2808.91,2436 3056.82,2436.01 3078.66,2414.17 3104.84,2414.17 3121,2398.01 3197.01,2322 J3_CD40073.2@3224,2322
C_MOS_3_CD40071: J7_CD40071.2 U1_CD40071.11 | length 599.1
  Top Layer w8: U1_CD40071.11@2714.39,3681.87 2714.39,3632.3 2747,3599.68 3073,3599.68 3117.32,3644 J7_CD40071.2@3232,3644
C_MOS_3_CD40072: J7_CD40072.2 U1_CD40072.11 | length 610.6
  Top Layer w8: U1_CD40072.11@2714.7,3135.87 2714.7,3086.3 2747.32,3053.68 3073.32,3053.68 3115.19,3095.56 3187.21,3095.56 3196.27,3086.5 J7_CD40072.2@3241.13,3086.5
C_MOS_3_CD40073: J7_CD40073.2 U1_CD40073.11 | length 548.1
  Top Layer w8: U1_CD40073.11@2713.94,2587.87 2713.94,2538.3 2746.56,2505.68 3072.56,2505.68 3105.38,2538.5 J7_CD40073.2@3185.38,2538.5
C_MOS_4_CD40071: J14_CD40071.2 U1_CD40071.12 | length 985
  Top Layer w8: U1_CD40071.12@2688.8,3681.87 2688.8,3631.89 2737.68,3579 3578,3579 J14_CD40071.2@3594,3595
C_MOS_4_CD40072: J14_CD40072.2 U1_CD40072.12 | length 1004.8
  Top Layer w8: U1_CD40072.12@2689.11,3135.87 2689.11,3085.89 2758,3017 3581,3017 3589.31,3025.31 J14_CD40072.2@3589.31,3047.91
C_MOS_4_CD40073: J14_CD40073.2 U1_CD40073.12 | length 998.2
  Top Layer w8: U1_CD40073.12@2688.35,2587.87 2688.35,2537.89 2737.24,2489 3068,2489 3083.09,2473.91 3575.66,2473.91 3588.56,2485.29 J14_CD40073.2@3588.56,2500.39 ; J14_CD40073.2@3587.04,2500.39 J14_CD40073.2@3588.56,2501.91
C_MOS_5_CD40071: J8_CD40071.2 U1_CD40071.10 | length 564.6
  Top Layer w8: U1_CD40071.10@2739.98,3681.87 2739.98,3637.71 2762,3615.68 3063,3615.68 3128.76,3681.44 J8_CD40071.2@3224.09,3681.44
C_MOS_5_CD40072: J8_CD40072.2 U1_CD40072.10 | length 564.6
  Top Layer w8: U1_CD40072.10@2740.29,3135.87 2740.29,3091.71 2762.32,3069.68 3063.32,3069.68 3122.63,3129 J8_CD40072.2@3227,3129
C_MOS_5_CD40073: J8_CD40073.2 U1_CD40073.10 | length 565.1
  Top Layer w8: U1_CD40073.10@2739.54,2587.87 2739.54,2543.71 2761.56,2521.68 3062.56,2521.68 3118.87,2578 J8_CD40073.2@3228,2578